# Altium PCB PCB1.PcbDoc (part 2 of 2)
Units mm, origin at the board's own origin, x right, y up, seen from the top; angles counter-clockwise.
Board outline 19 x 71.98 mm, 2 copper layers (Top Layer, Bottom Layer), stack 0.792 mm thick; 87 components, 51 nets, 279 pads, 160 vias.
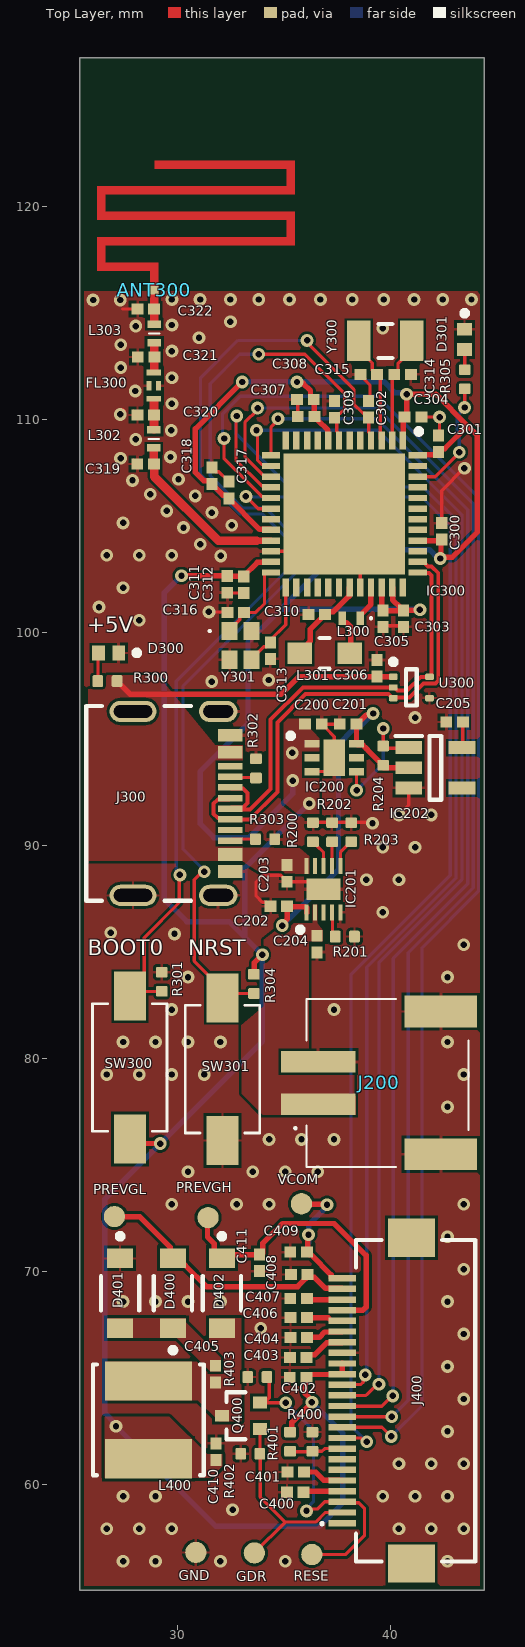
[diagram p0: Top Layer view]

## Polygon pours and split planes (outlines as drawn) (continued)
+3V3 on Top Layer "+3V3_L01_P009" (solid, pour order 9): 36.65,95.05 36.225,95.475 36.225,95.95 34.975,95.95 34.975,92 35.625,91.5 36.65,91.5
NetC405_1 on Top Layer "NETC405_1_L01_P003" (solid, remove dead copper, pour order 3): 26.6,65.75 26.6,63.95 30.95,63.95 31.95,62.95 32.975,62.95 32.975,66.9 32.975,67.8 31.475,67.8 31.475,65.75 30.675,65.75 30.65,65.75
BAT+ on Top Layer "BAT+_L01_P008" (solid, pour order 8): 38.324,78.345 38.349,78.32 38.349,77.345 34.899,77.345 33.999,77.345 32.999,78.345 32.979,81.57 34.039,82.458 34.04,85.565 35.016,86.351 36.35,86.35 36.35,87.225 36.55,87.225 36.55,86.346 36.8,86.028 36.8,85.495 36.152,85.495 36.152,80.345 38.299,80.345 38.299,78.32
+3V3 on Top Layer "+3V3_L01_P010" (solid, pour order 10): 26.575,63.175 26.575,60.3 31.55,60.3 32.1,60.85 32.1,61.4 31.375,61.4 29.6,63.175
GND on Bottom Layer "GND_L02_P014" (solid, pour order 14): 25.4,116 44.4,116 44.4,55.009 44.384,55.025 25.4,55.025
+3V3 on Bottom Layer "+3V3_L02_P013" (solid, pour order 13): 36.65,95.05 36.225,95.475 36.225,95.95 34.975,95.95 34.975,92 35.625,91.5 36.65,91.5

## Silkscreen, mask and mechanical layers (free items; w line width, h text height)
Top Overlay:
  text "+5V" at 25.75,99.75 h1.27
  text "BOOT0" at 25.775,84.6 h1.27
  text "NRST" at 30.5,84.6 h1.27
Mechanical 1:
  lines w0.254: 25.4,55.025 44.375,55.025 ; 25.4,55.049 25.4,127 44.4,127 44.4,116 44.4,55.025